# EAGLE board PCB_v1_Juliana_gabrielpaiva (EAGLE 9.7.0)
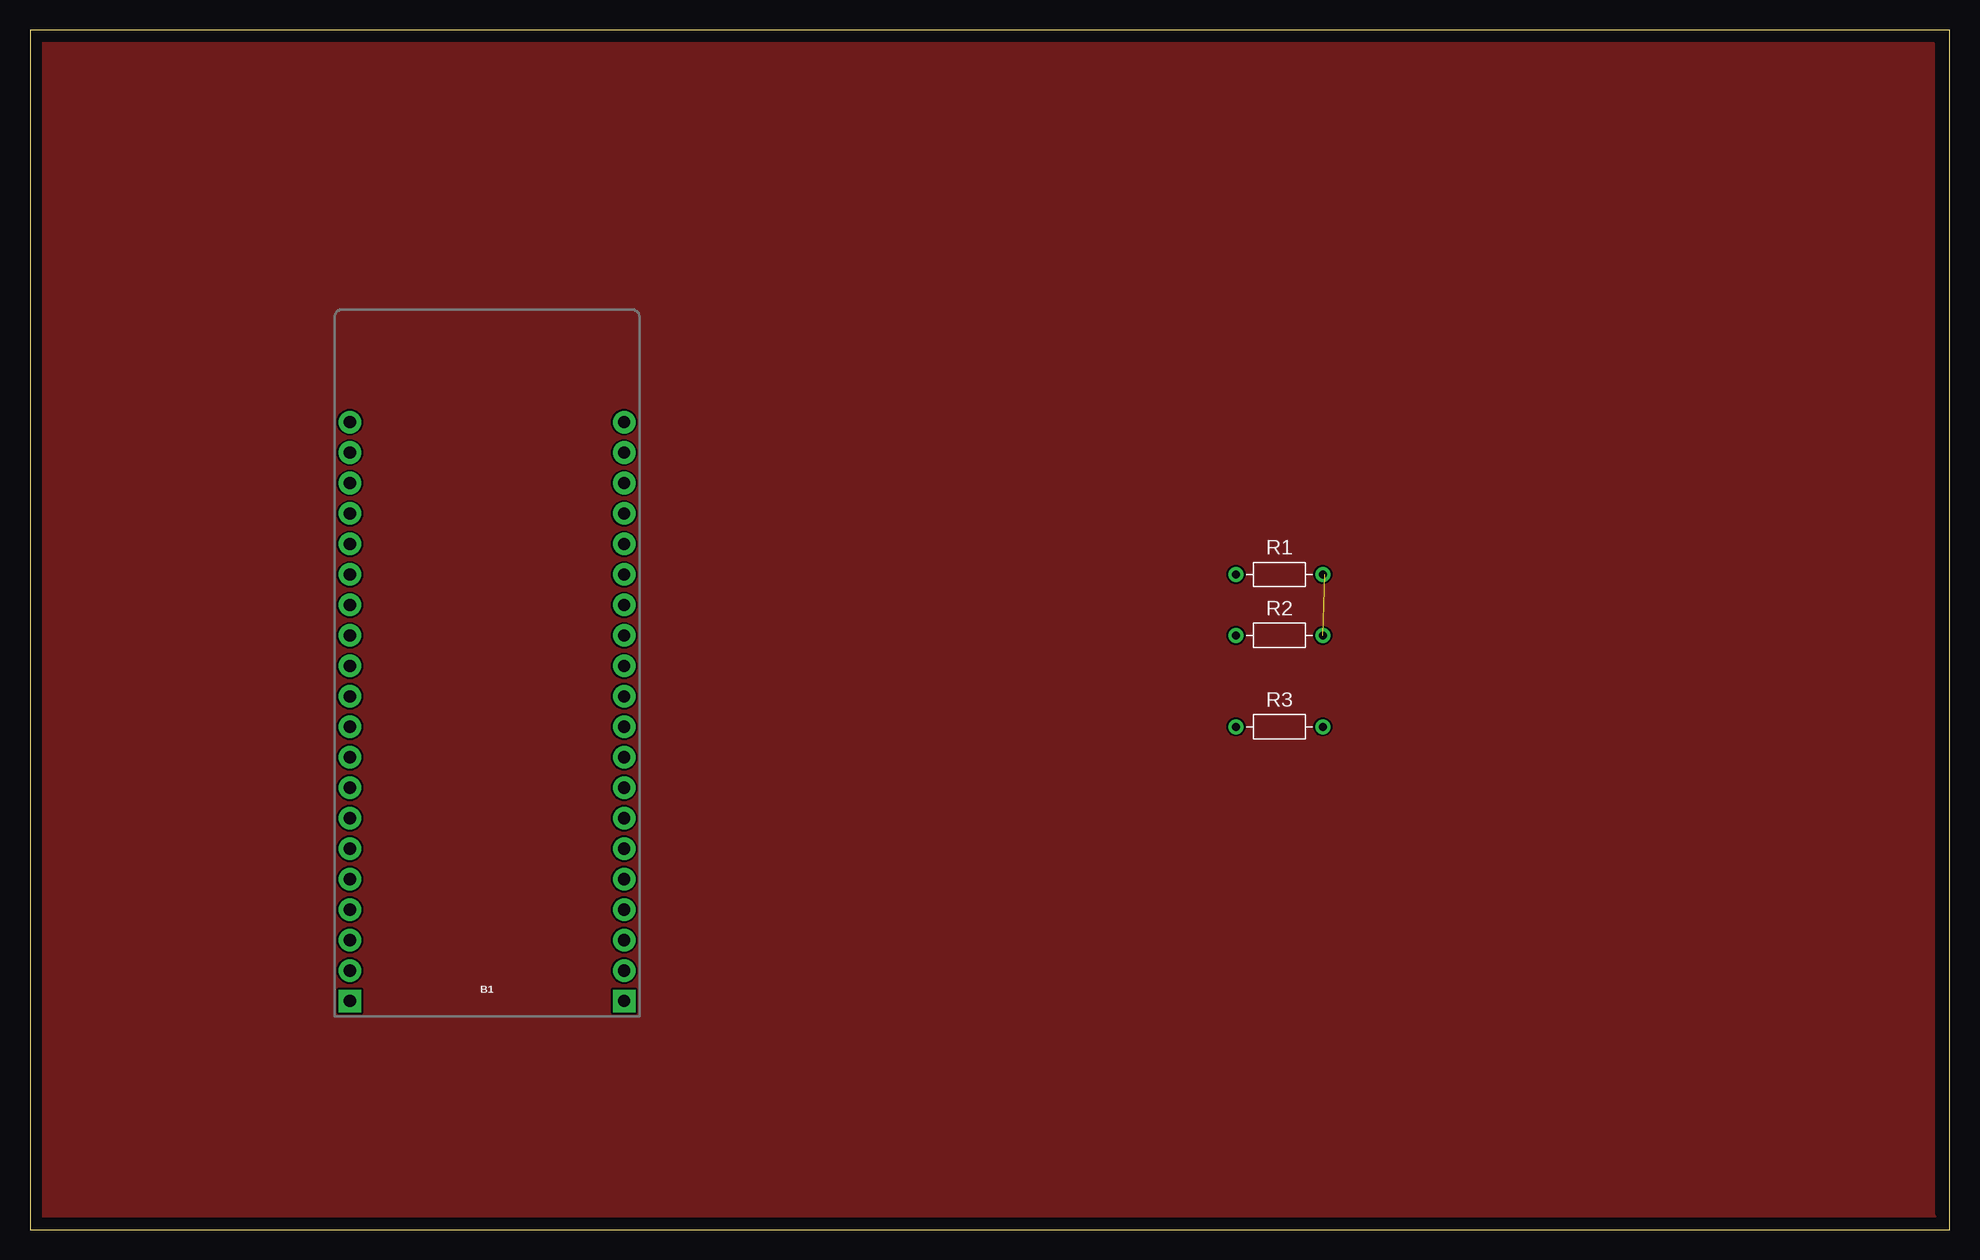
[diagram p0: board, top side]
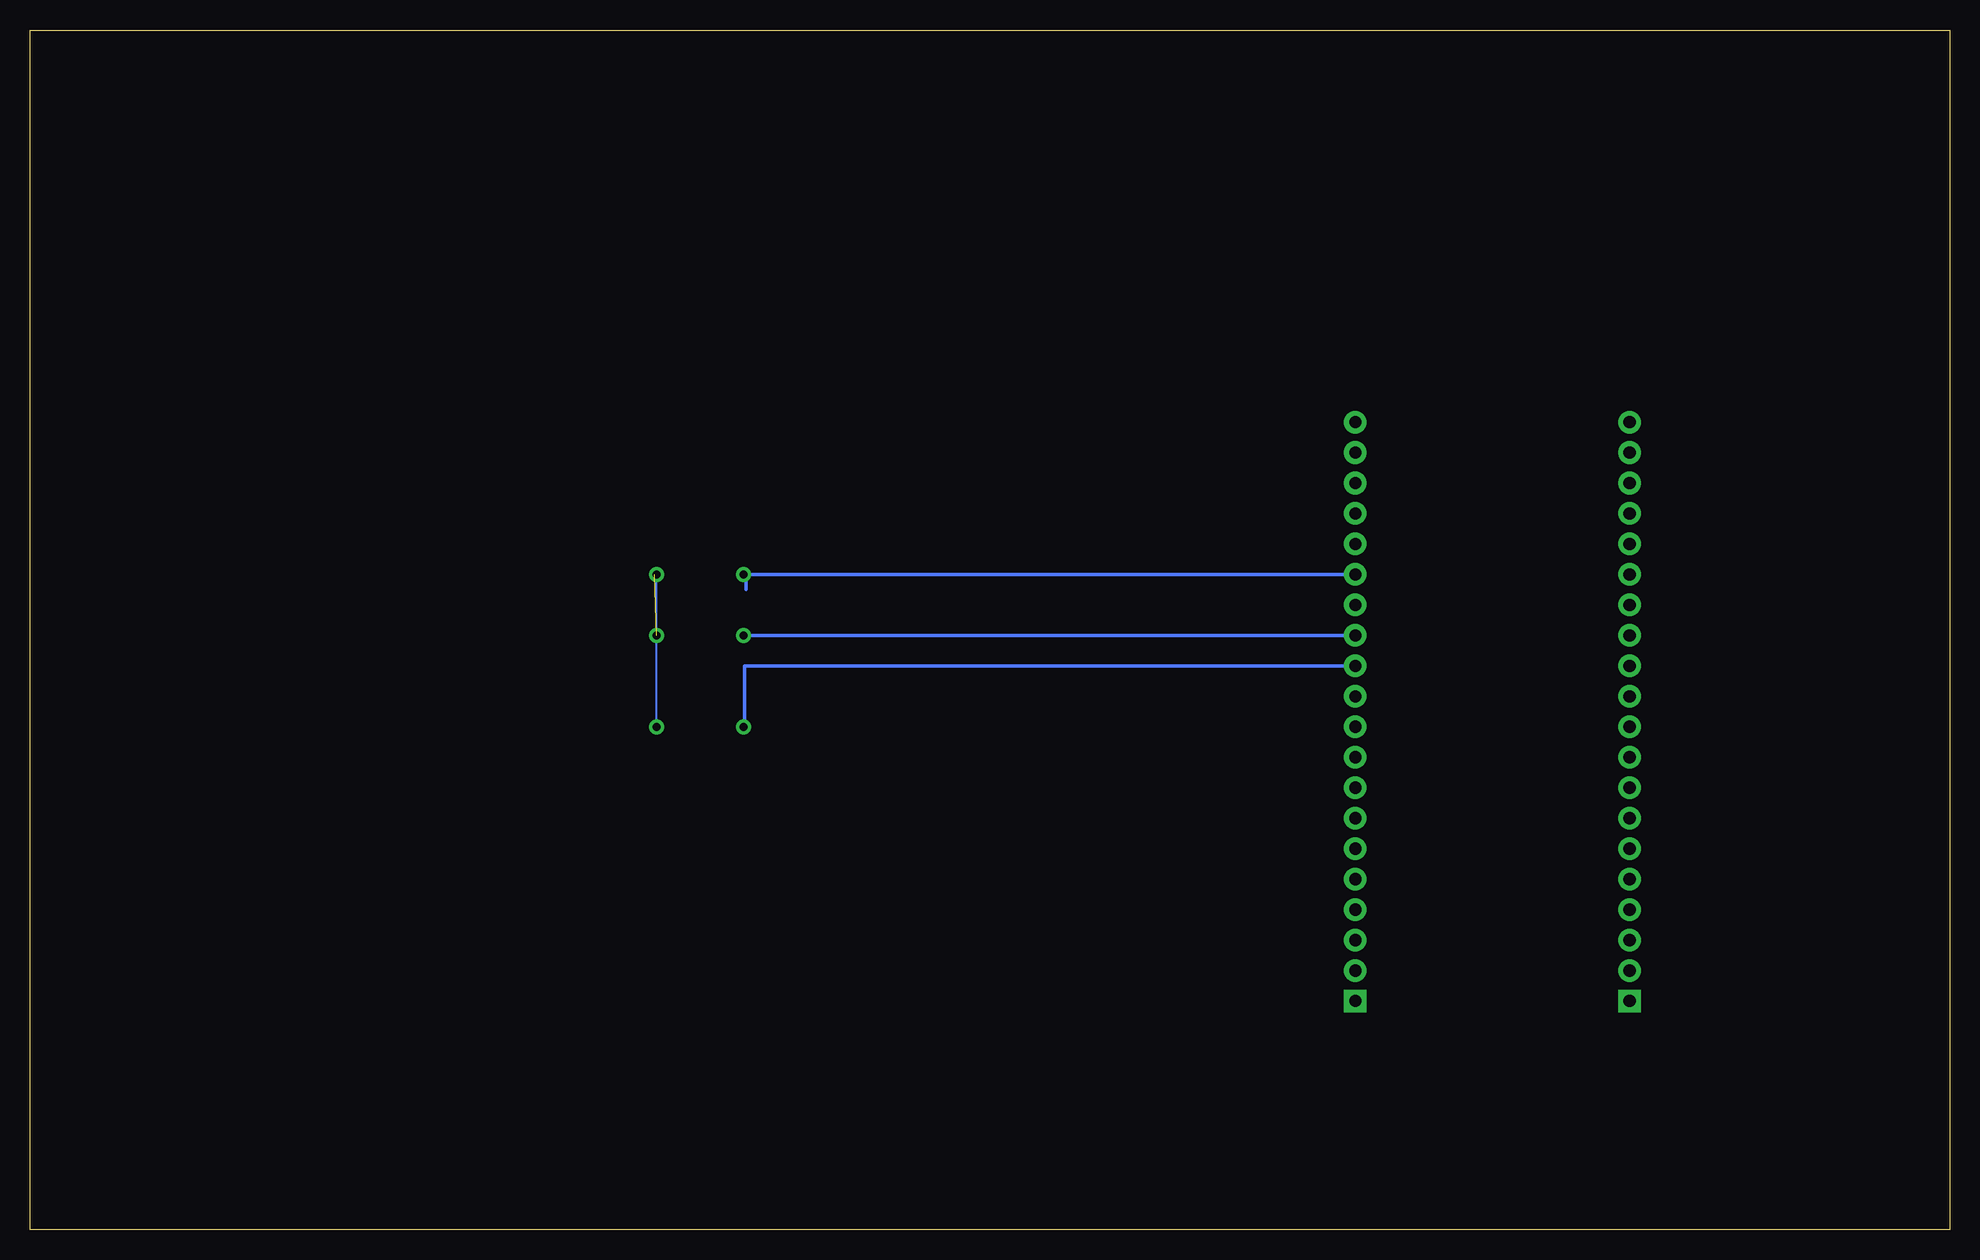
[diagram p1: board, bottom side, seen from below]

Size 160 x 100 mm. Coordinates in mm from the lower left corner, seen from the top.
Outline: 0,0 160,0 160,100 0,100 0,0
Copper layers (1*16): Top / Bottom
Stack-up Default Layer Stack: Top User Defined 0.035mm / Dielectric-1 User Defined 1.5mm / Bottom User Defined 0.035mm
Design rules: minimum copper width 6mil, minimum drill size 0.35mm, copper clearance wire_polygon to wire_polygon 6mil, copper clearance wire_polygon to pad_smd 6mil, copper clearance wire_polygon to via 6mil, copper clearance pad_smd to pad_smd 6mil, copper clearance pad_smd to via 6mil, copper clearance via to via 6mil, copper clearance smd to pad (same net) 6mil, copper clearance smd to via (same net) 6mil, copper clearance smd to smd (same net) 6mil, dimension clearance 40mil, restrict clearance 0mil, drill distance 6mil, keepout clearance 0mil

## Footprints (pad centres in the part's own frame; a part is rotated, then mirrored left to right if it is on the bottom)
ESP32_THING_NO_ANT = drill 1.016 pad 1.88 square: 1 1.27,1.27; 40 24.13,1.27 | drill 1.016 pad 1.88: 2 1.27,3.81; 3 1.27,6.35; 4 1.27,8.89; 5 1.27,11.43; 6 1.27,13.97; 7 1.27,16.51; 8 1.27,19.05; 9 1.27,21.59; 10 1.27,24.13; 11 1.27,26.67; 12 1.27,29.21; 13 1.27,31.75; 14 1.27,34.29; 15 1.27,36.83; 16 1.27,39.37; 17 1.27,41.91; 18 1.27,44.45; 19 1.27,46.99; 20 1.27,49.53; 21 24.13,49.53; 22 24.13,46.99; 23 24.13,44.45; 24 24.13,41.91; 25 24.13,39.37; 26 24.13,36.83; 27 24.13,34.29; 28 24.13,31.75; 29 24.13,29.21; 30 24.13,26.67; 31 24.13,24.13; 32 24.13,21.59; 33 24.13,19.05; 34 24.13,16.51; 35 24.13,13.97; 36 24.13,11.43; 37 24.13,8.89; 38 24.13,6.35; 39 24.13,3.81
RESAD724W46L381D178B = drill 0.66 pad 1.26: 1 -3.62,0; 2 3.62,0

## Placement (x,y rotation side)
B1  ESP32_THING_WO_ANT_KEEPOUT  [ESP32_THING_NO_ANT]  25.4,17.78 0 top
R1  [RESAD724W46L381D178B]  104.14,54.61 0 top
R2  [RESAD724W46L381D178B]  104.14,49.53 0 top
R3  [RESAD724W46L381D178B]  104.14,41.91 0 top

## Library data of the parts
B1 = SparkFun-Boards
R1-R3 = Resistor; CATEGORY: Resistor; SUB-CATEGORY: Fixed

## Nets
DGND: R1.2 R2.2 R3.2
LED01: B1.26 R1.1
LED02: B1.28 R2.1
LED03: B1.29 R3.1

## Tracks (layer width: path | path; a pad name or v marks a point on that pad's centre or on a via)
DGND  (1 unrouted)
  Bottom 0.152: R3.2 R2.2 107.76,54.42 107.95,54.61
LED01
  Bottom 0.152: B1.26 R1.1
  Bottom 0.305: B1.26 100.33,54.61 100.33,53.34
LED02
  Bottom 0.152: 100.33,49.53 R2.1
  Bottom 0.305: B1.28 100.33,49.53
LED03
  Bottom 0.152: B1.29 95.44,46.99 | 100.42,42.01 R3.1
  Bottom 0.305: B1.29 100.42,46.99 100.42,42.01
N$1
  pour Top: 0,99.06 158.75,99.06 158.75,1.27 160.02,0 0,0